# Altium PCB 48V-24V Buck Converter.PcbDoc
Units mil, origin at the board's own origin, x right, y up, seen from the top; angles counter-clockwise.
Board outline 2261.35 x 1643.57 mil, 4 copper layers (Top Layer, L2 - GND, L3 - POWER, Bottom Layer), stack 23.756 mil thick; 39 components, 21 nets, 106 pads, 157 vias.
Unrouted connection lines stored in the file: 7.
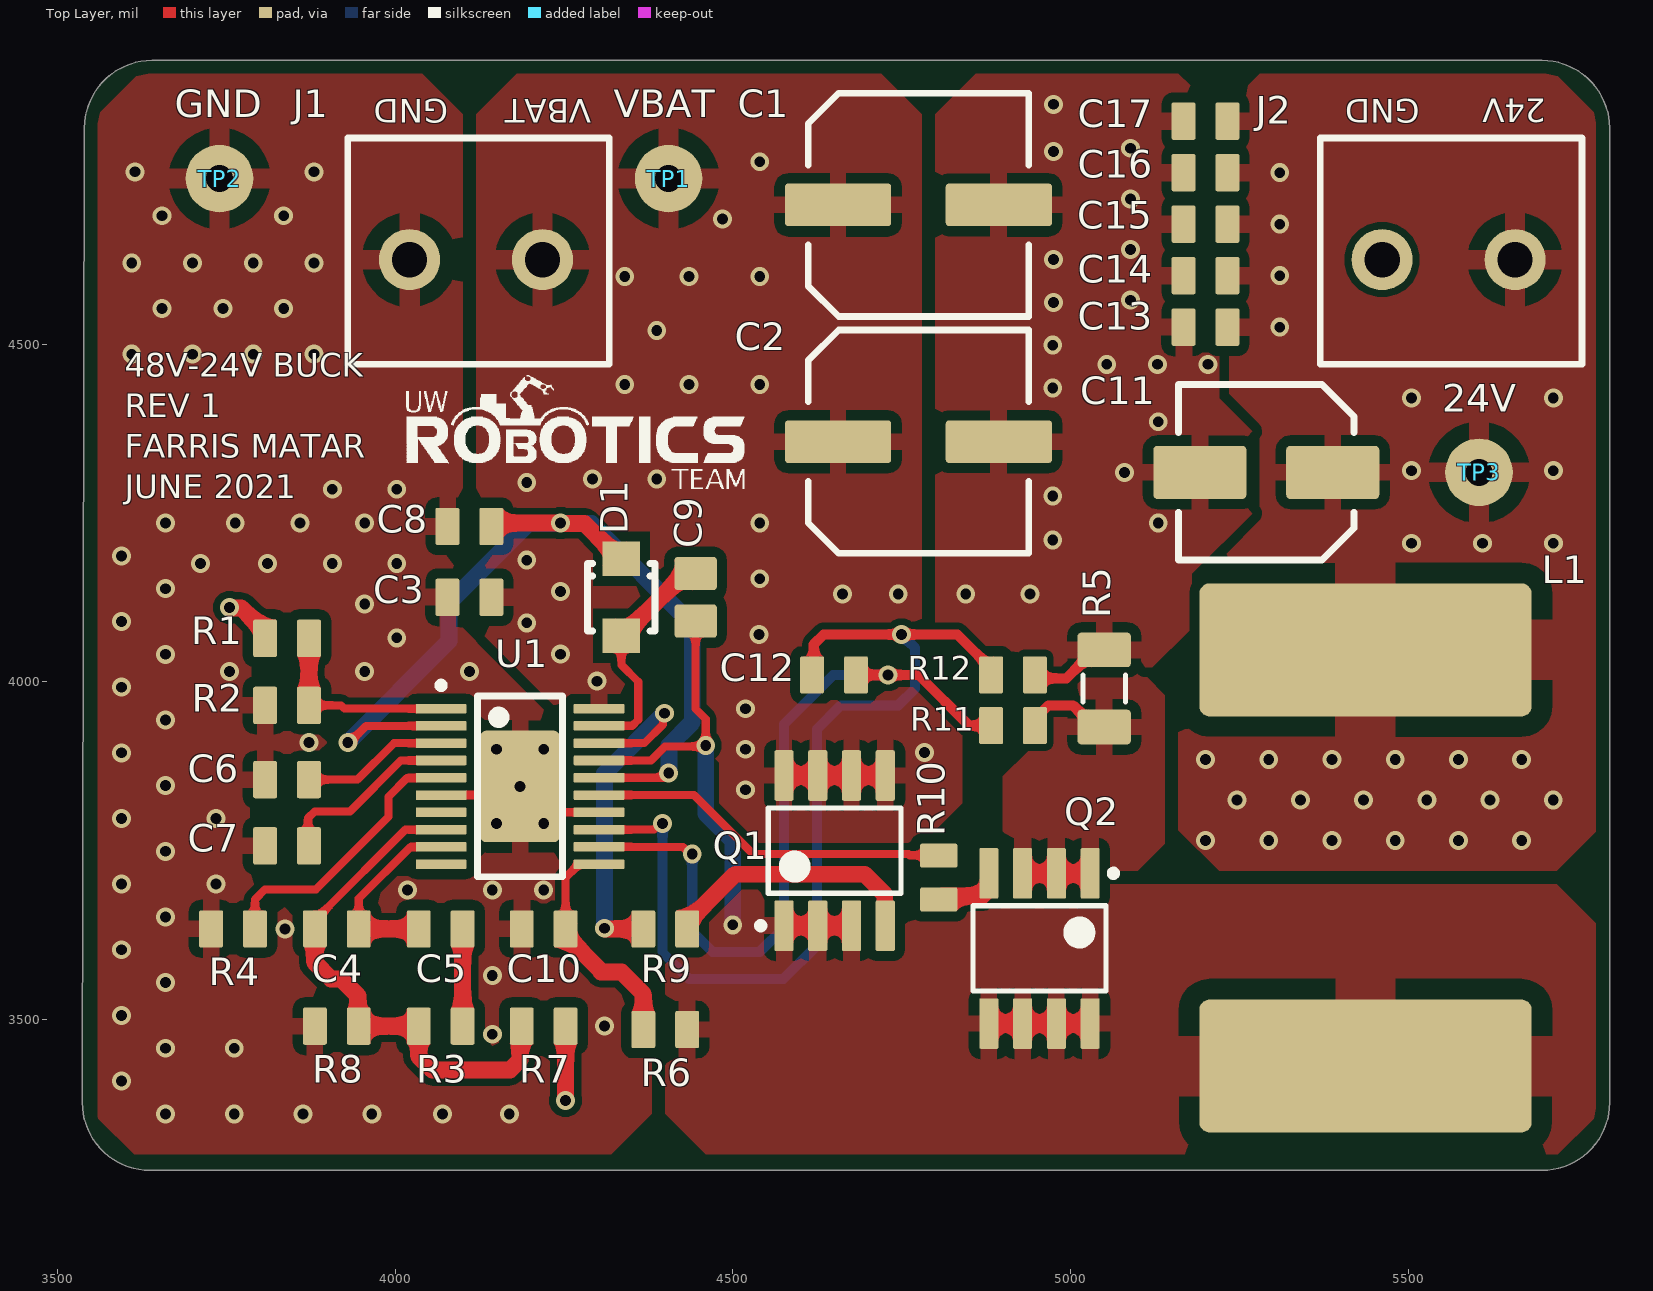
[diagram p0: Top Layer view]
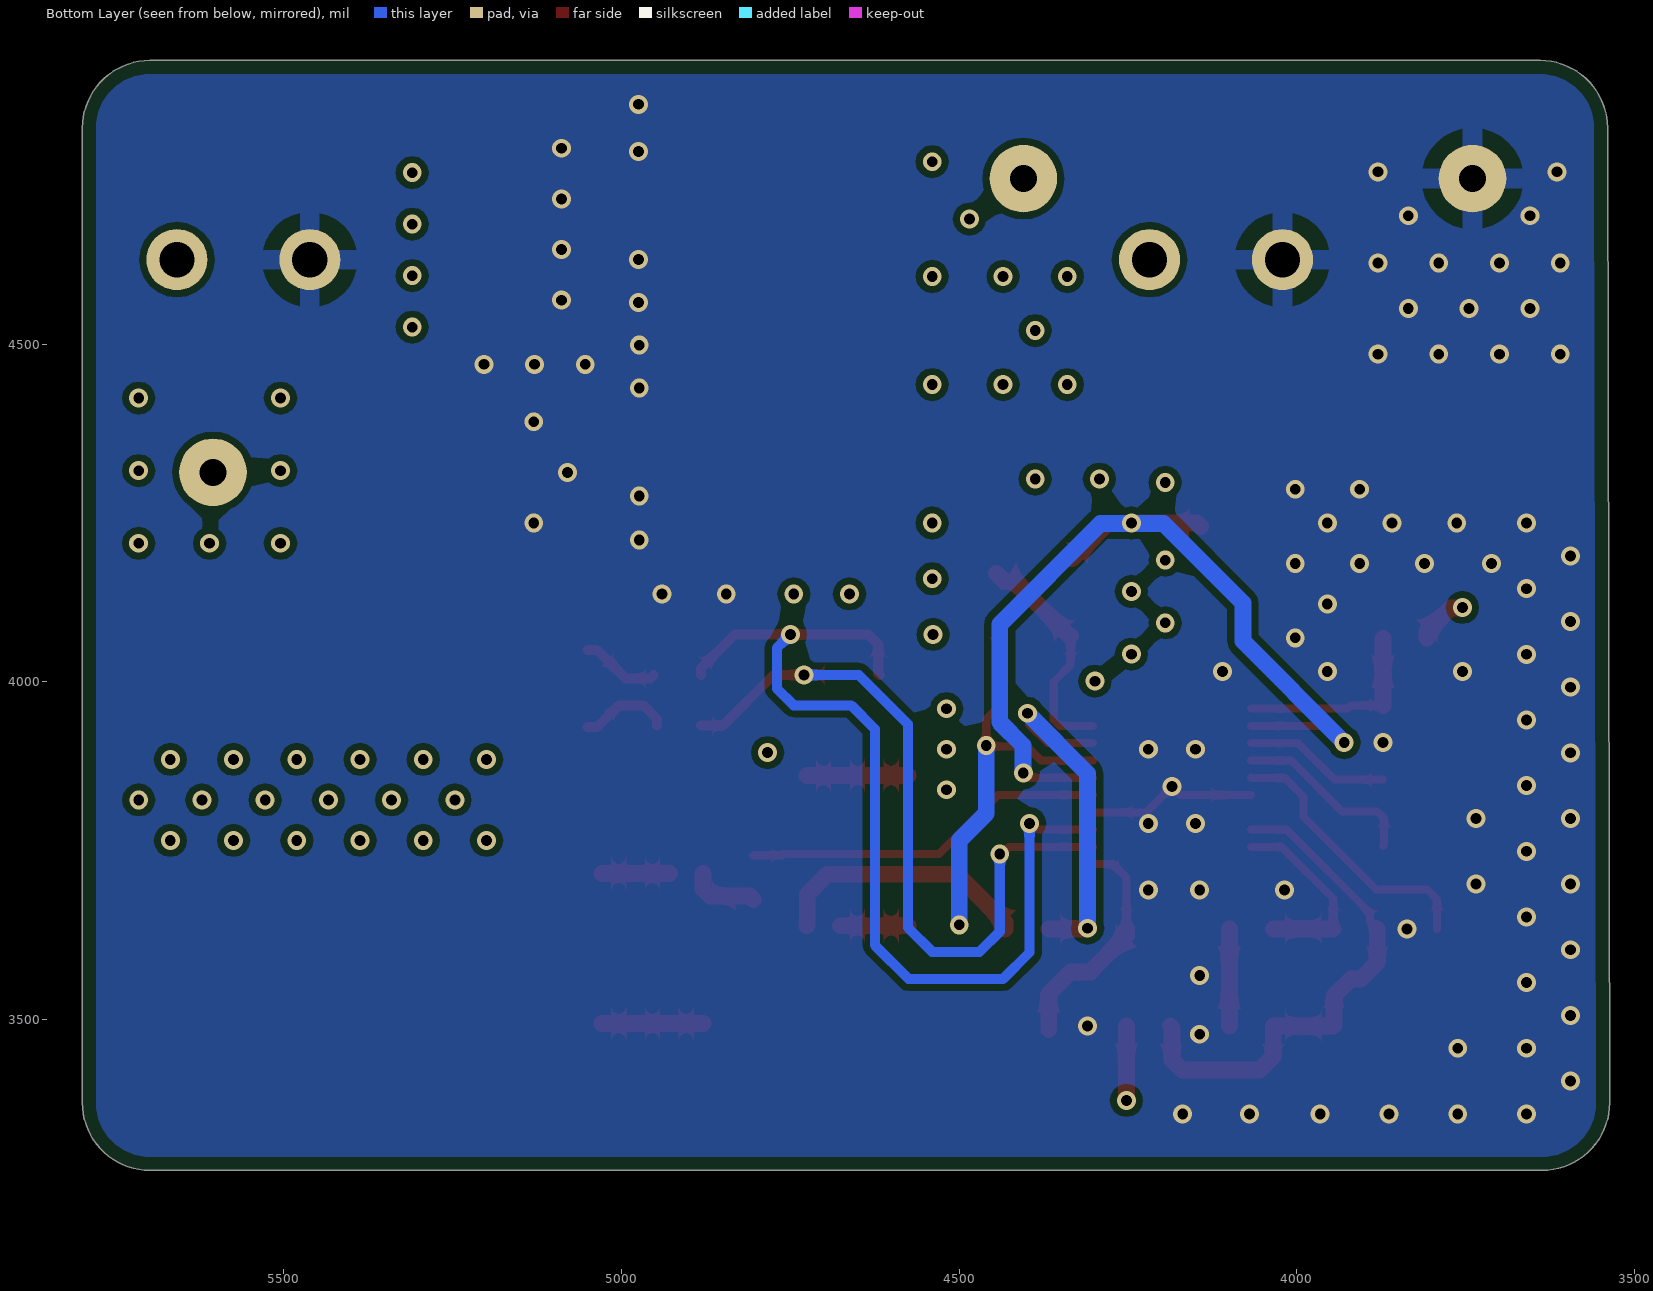
[diagram p1: Bottom Layer view, seen from below]
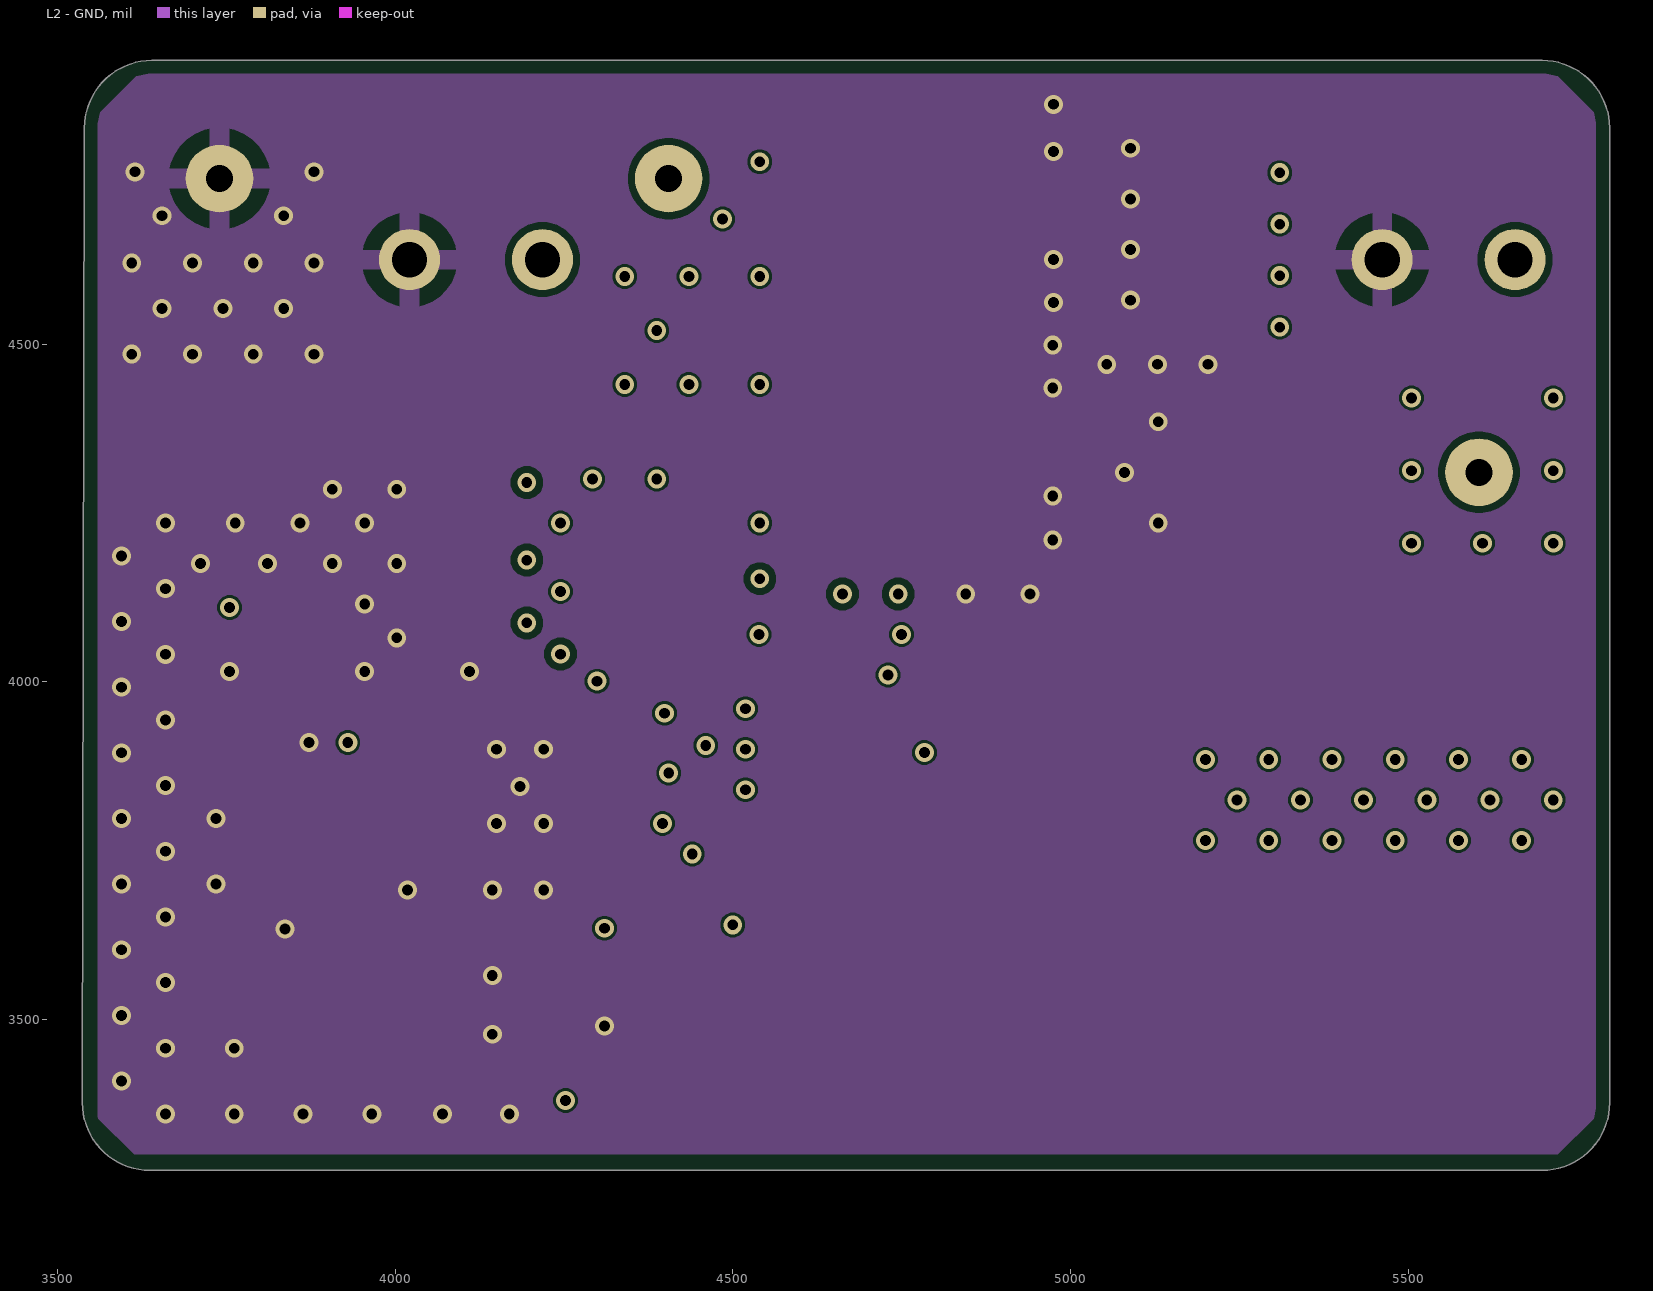
[diagram p2: L2 - GND]
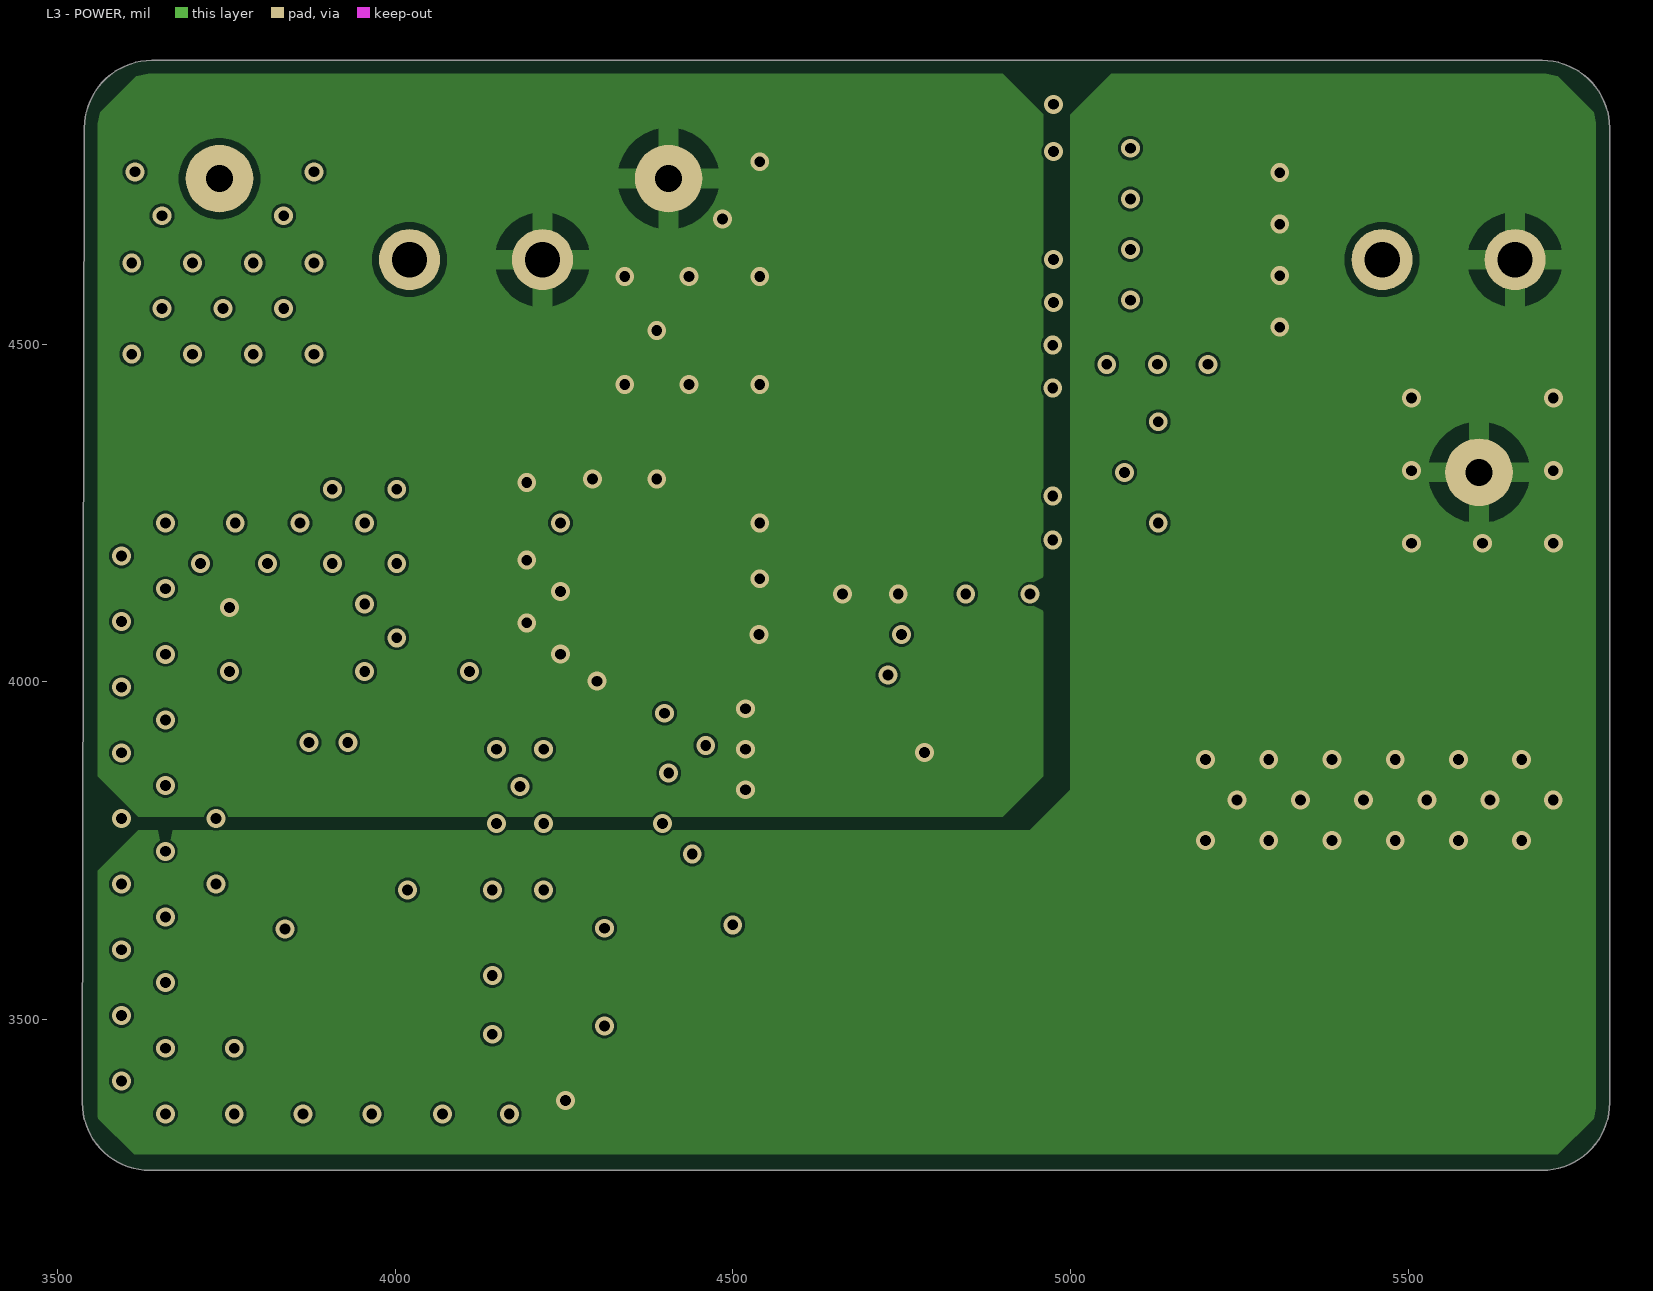
[diagram p3: L3 - POWER]
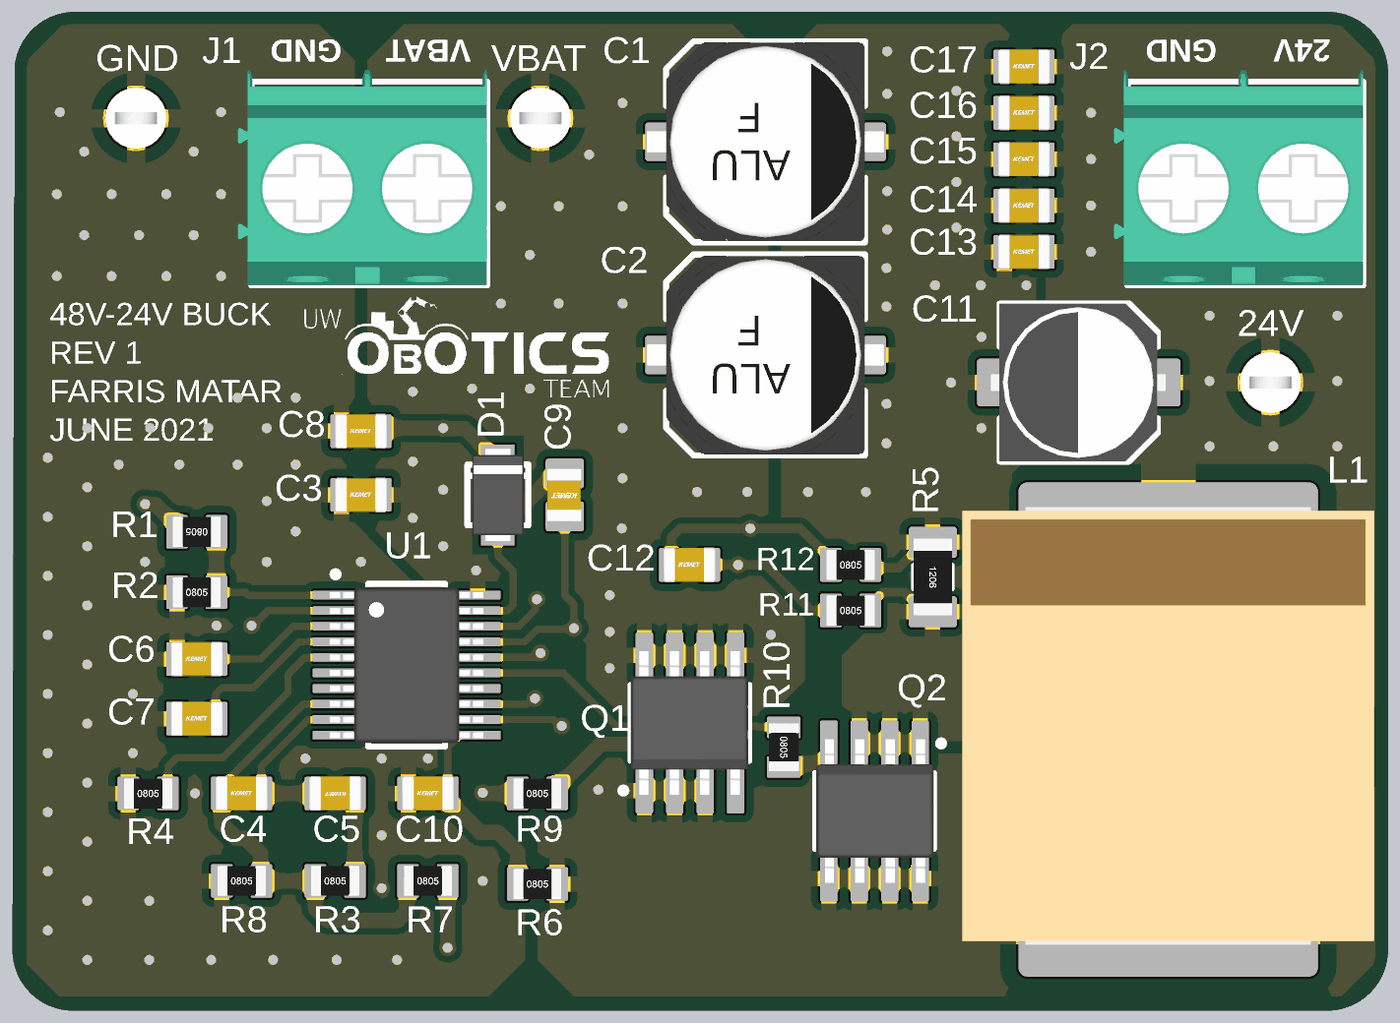
[diagram p4: 3D render of the assembled board from above, using the file's embedded part models]

## Layer stack, top to bottom
Top Solder: solder mask 0.4, Solder Resist, Dk 3.5
Top Layer: signal copper 1.4
Dielectric 2: prepreg 2.8, PP-006, Dk 4.1
L2 - GND: signal copper 1.378
Dielectric 1: dielectric 12.6, FR-4, Dk 4.8
L3 - POWER: signal copper 1.378
Dielectric 3: prepreg 2.8, PP-006, Dk 4.1
Bottom Layer: signal copper 1.4
Bottom Solder: solder mask 0.4, Solder Resist, Dk 3.5

## Board outline
3537,3376.43 ccw(c3637,3376.43) 3637,3276.43 3820.01,3276.43 5698.35,3276.43 ccw(c5698.35,3376.43) 5798.35,3376.43 5798.35,4820 ccw(c5698.35,4820) 5698.35,4920 3640,4920 ccw(c3640,4820) 3540,4820 3540,4800

## Design rules (kind name [scope] priority, off if disabled: settings)
BoardOutlineClearance [All] p1: gap=10 ignorepadtopadclearanceinfootprint=FALSE except(0: Arc-SplitContinuation Track-SplitContinuation SMDPad-SplitContinuation THPad-SplitContinuation Via-SplitContinuation Fill-SplitContinuation Poly-SplitContinuation Region-SplitContinuation Text-SplitContinuation; 20: Poly-OutlineEdge)
Clearance [All] p1: gap=10 ignorepadtopadclearanceinfootprint=FALSE except(0: Arc-Hole Track-Hole SMDPad-Hole THPad-Hole Via-Hole Fill-Hole Poly-Hole Region-Hole Text-Hole; 15: SMDPad-Poly Poly-Poly)
MinimumSolderMaskSliver [All] p1: minsoldermaskwidth=3
PolygonConnect PolygonConnect_CS [(InComponent('R11') OR InComponent('R12'))] p1: thpad.connectstyle=Relief thpad.reliefconductorwidth=10 thpad.reliefentries=4 thpad.polygonreliefangle="90 Angle" thpad.airgapwidth=10 smdpad.connectstyle=NoConnect smdpad.reliefconductorwidth=10 smdpad.reliefentries=4 smdpad.polygonreliefangle="90 Angle" smdpad.airgapwidth=10 via.connectstyle=Relief via.reliefconductorwidth=10 via.reliefentries=4 via.polygonreliefangle="90 Angle" via.airgapwidth=10
PolygonConnect PolygonConnect_Inductor [HasFootprint('IND_PULSE_PA4344')] p2: connectstyle=Relief reliefconductorwidth=90 reliefentries=4 polygonreliefangle="90 Angle" airgapwidth=30
PolygonConnect PolygonConnect_Default [All] p3: thpad.connectstyle=Relief thpad.reliefconductorwidth=30 thpad.reliefentries=4 thpad.polygonreliefangle="90 Angle" thpad.airgapwidth=25 smdpad.connectstyle=Relief smdpad.reliefconductorwidth=25 smdpad.reliefentries=4 smdpad.polygonreliefangle="90 Angle" smdpad.airgapwidth=15 via.connectstyle=Direct via.reliefconductorwidth=10 via.reliefentries=4 via.polygonreliefangle="90 Angle" via.airgapwidth=10
RoutingVias [All] p1: holewidth=12 width=24 viastyle="Through Hole" minholewidth=12 minwidth=24 maxholewidth=28 maxwidth=50
SolderMaskExpansion [All] p1: expansion=4 istentingtop=FALSE
Width [All] p1: maxlimit=50 minlimit=10 preferedwidth=10 midlayer1_maxwidth=10 midlayer2_maxwidth=10 minimp=50.000000 maximp=50.000000 favimp=50.000000
29 further rules are at their usual default settings.

## Components (designator, comment, footprint, x,y, rotation, side; value= is the part's Value field where it differs from the comment)
C1 "CAP_22uF_80V_ALUM" RADIAL_KEMET_KN 4775,4706.14 r270 top value=22µF
C2 "CAP_22uF_80V_ALUM" RADIAL_KEMET_KN 4775,4355.42 r270 top value=22µF
C3 "CAP_0.1uF_100V_0805" CAP0805 4110,4125 r0 top value=0.1µF
C4 "CAP_150pF_16V_0805" CAP0805 3913.75,3634 r0 top value=150pF
C5 "CAP_330pF_50V_0805" CAP0805 4067.5,3634 r180 top value=330pF
C6 "CAP_0.47uF_25V_0805" CAP0805 3840,3855 r0 top value=0.47µF
C7 "CAP_0.015uF_50V_0805" CAP0805 3840,3757 r0 top value=0.015µF
C8 "CAP_0.47uF_25V_0805" CAP0805 4110,4230 r0 top value=0.47µF
C9 "CAP_0.22uF_100V_0805" CAP2012 4445,4125 r90 top value=0.22μF
C10 "CAP_820pF_50V_0805" CAP0805 4220,3634 r0 top value=820pF
C11 "CAP_100uF_35V_ALUM" RADIAL_CORNELL_D 5290,4310.01 r90 top value=100µF
C12 "CAP_NU_0805" CAP0805 4650,4010 r0 top value=NU
C13 "CAP_NU_0805" CAP0805 5200,4525 r0 top value=NU
C14 "CAP_NU_0805" CAP0805 5200,4601.25 r0 top value=NU
C15 "CAP_NU_0805" CAP0805 5200,4677.5 r0 top value=NU
C16 "CAP_NU_0805" CAP0805 5200,4753.75 r0 top value=NU
C17 "CAP_NU_0805" CAP0805 5200,4830 r0 top value=NU
D1 "DIO_SCHOTTKY_100V_150mA" SOD-123_FLAT 4335,4125 r270 top
J1 "CON_2POS_SCREW_TERM" 1935161 4119.8,4625 r180 top
J2 "CON_2POS_SCREW_TERM" 1935161 5560,4625 r180 top
L1 "IND_33uH_12.0A" IND_PULSE_PA4344 5436.98,3745 r270 top
Q1 "NMOS_100V_10.3A" 8-SOIC_NMOS 4650,3750 r90 top
Q2 "NMOS_100V_10.3A" 8-SOIC_NMOS 4955,3605 r270 top
R1 "RES_54.9kΩ_0805_1%" RES0805 3840,4064.34 r180 top value=54.9kΩ
R2 "RES_2.32kΩ_0805_1%" RES0805 3840,3965 r0 top value=2.32kΩ
R3 "RES_133kΩ_0805_1%" RES0805 4067.5,3490 r0 top value=133kΩ
R4 "RES_12.1kΩ_0805_1%" RES0805 3760,3634 r0 top value=12.1kΩ
R5 "RES_0.015Ω_1206_1%" RES1206 5050,3990 r270 top value=0.015Ω
R6 "RES_267kΩ_0805_1%" RES0805 4400,3485 r0 top value=267kΩ
R7 "RES_34.8kΩ_0805_1%" RES0805 4220,3490 r0 top value=34.8kΩ
R8 "RES_1.2kΩ_0805" RES0805 3913.75,3490 r0 top value=1.2kΩ
R9 "RES_0Ω_0805" RES0805 4400,3634 r0 top value=0Ω
R10 "RES_0Ω_0805" RES0805 4805,3710 r270 top value=0Ω
R11 "RES_0Ω_0805" RES0805 4915,3935 r0 top value=0Ω
R12 "RES_0Ω_0805" RES0805 4915,4010 r0 top value=0Ω
TP1 "TESTPOINT_LOOP" TESTPOINT_LOOP 4405,4745 r0 top
TP2 "TESTPOINT_LOOP" TESTPOINT_LOOP 3740,4745 r0 top
TP3 "TESTPOINT_LOOP" TESTPOINT_LOOP 5605,4310 r0 top
U1 "BUCK_LM5117PWP" HTSSOP 4185,3845 r0 top

## Footprints (in the part's own frame and the unit in brackets; to place one, negate y for a bottom-side part, rotate by r counter-clockwise, add the part's x,y. Pads: shape width x height; smd on the part's side, far side on the other; paste and mask are expansions set on the pad)
8-SOIC_NMOS [mm]
  rrect15% 1.9x0.72 smd: 1(-2.827,-1.926) 2(-2.827,-0.656) 2(-2.827,0.614) 2(-2.827,1.884) 3(2.823,-1.926) 3(2.823,-0.656) 3(2.823,0.614) 3(2.823,1.884)
  silkscreen extent -2.95,-2.52 1.6,2.88, body extent -3,-2.45 3,2.45, height 1.63
1935161 [mm] "TERM BLK 2POS SIDE ENTRY 5MM PCB"
  round 2.3 hole 1.325: 1(-2.5,0) 2(2.5,0)
  silkscreen extent -5.01,-4.57 4.83,3.94, body extent -5.01,-5.06 5.39,3.94, height 11.41
CAP0805 [mm] "Chip Capacitor, Body 2.0x1.2mm, Height 0.45mm, IPC Medium Density"
  rrect15% 0.9x1.4 smd: 1(-0.825,0) 2(0.825,0)
  body extent -1.1,-0.73 1.1,0.73, height 1.39
CAP2012 [mm]
  rrect20% 1.25x1.6 smd: 1(-0.895,0) 2(0.895,0)
  body extent -1.1,-0.7 1.1,0.75, height 1.41
HTSSOP [mm]
  rrect15% 1.9x0.36 smd: 1(-2.97,2.925) 2(-2.97,2.275) 3(-2.97,1.625) 4(-2.97,0.975) 5(-2.97,0.325) 6(-2.97,-0.325) 7(-2.97,-0.975) 8(-2.97,-1.625) 9(-2.97,-2.275) 10(-2.97,-2.925) 11(2.97,-2.925) 12(2.97,-2.275) 13(2.97,-1.625) 14(2.97,-0.975) 15(2.97,-0.325) 16(2.97,0.325) 17(2.97,0.975) 18(2.97,1.625) 19(2.97,2.275) 20(2.97,2.925)
  rrect15% 3x4.2 smd: 21(0,0)
  silkscreen extent -3.09,-3.4 1.6,3.92, body extent -3.2,-3.25 3.2,3.25, height 1.1
IND_PULSE_PA4344 [mm]
  rrect15% 5x12.5 smd: 1(-7.675,0) 2(7.975,0)
  body extent -9.14,-8.6 9.14,8.6, height 7.06
RADIAL_CORNELL_D [mm] "Size D radial surface mount capacitor"
  rrect15% 2x3.5 smd: 1(0,-2.5) 2(0,2.5)
  silkscreen extent -3.3,-3.3 3.3,3.3, body extent -3.3,-3.62 3.3,3.67, height 5.9
RADIAL_KEMET_KN [mm]
  rrect15% 1.6x4 smd: 1(0,-3.025) 2(0,3.025)
  silkscreen extent -4.2,-4.15 4.2,4.15, body extent -4.15,-4.95 4.15,4.95, height 10.2
RES0805 [mm] "Chip Resistor, 2-Leads, Body 2.00x1.25mm, IPC High Density"
  rrect15% 0.9x1.4 smd: 1(-0.825,0) 2(0.825,0)
  body extent -1,-0.62 1,0.63, height 0.61
RES1206 [mm] "Chip Resistor, Body 3.2x1.6mm, IPC Medium Density"
  rrect20% 1.3x2 smd: 1(-1.45,0) 2(1.45,0)
  silkscreen extent -0.5,-0.8 0.5,0.8, body extent -1.6,-0.8 1.6,0.8, height 0.61
SOD-123_FLAT [mm]
  rect 1.3x1.4 smd: 1(-1.45,0) 2(1.45,0)
  silkscreen extent -1.27,-1.27 1.27,1.27, body extent -1.93,-1.08 1.92,1.08, height 1.35
TESTPOINT_LOOP [mm]
  round 2.54 hole 1.02: 1(0,0)
  body extent -1.27,-1.27 1.27,1.27, height 4.57

## Part data
C1 C2: "CAP ALUM POLY 22UF 20% 80V SMD", Manufacturer 1=KEMET, Manufacturer Part Number 1=A767KN226M1KLAE045, Package/Footprint=SMD, Supplier Part Number 1=399-15649-1-ND, Voltage Rating=80V, Mounting Type=SMD, Supplier 1=Digi-Key
C3: "CAP CER 0.1UF 100V X7R 0805", Manufacturer 1="TDK Corporation", Manufacturer Part Number 1=C2012X7R2A104K125AA, Package/Footprint=0805, Supplier Part Number 1=445-1418-1-ND, Voltage Rating=100V, Supplier 1=Digi-Key
C4: "CAP CER 150PF 16V X7R 0805", Manufacturer 1="Würth Elektronik", Manufacturer Part Number 1=885012207028, Package/Footprint=0805, Supplier Part Number 1=732-8028-1-ND, Voltage Rating=16V, Supplier 1=Digi-Key
C5: "CAP CER 330PF 50V C0G/NPO 0805", Manufacturer 1=Yageo, Manufacturer Part Number 1=CC0805JRNPO9BN331, Package/Footprint=0805, Supplier Part Number 1=311-1117-1-ND, Voltage Rating=50V, Supplier 1=Digi-Key
C6 C8: "CAP CER 0.47UF 25V X5R 0805", Manufacturer 1=KEMET, Manufacturer Part Number 1=C0805C474K3PAC7800, Package/Footprint=0805, Supplier Part Number 1=399-15508-1-ND, Voltage Rating=25V, Supplier 1=Digi-Key
C7: "CAP CER 0.015UF 50V C0G 0805", Manufacturer 1="TDK Corporation", Manufacturer Part Number 1=CGA4F2C0G1H153J085AA, Package/Footprint=0805, Supplier Part Number 1=445-6948-1-ND, Voltage Rating=50V, Supplier 1=Digi-Key
C9: "CAP CER 0.22UF 100V X7R 0805", Dielectric=X7R, Manufacturer 1="Taiyo Yuden", Manufacturer Part Number 1=HMJ212BB7224KGHT, Package/Footprint=0805, Supplier Part Number 1=587-4221-1-ND, Voltage Rating=100V, Mounting Type=SMD, Supplier 1=Digi-Key
C10: "CAP CER 820PF 50V C0G/NP0 0805", Manufacturer 1=KEMET, Manufacturer Part Number 1=C0805X821J5GAC7800, Package/Footprint=0805, Supplier Part Number 1=399-19481-1-ND, Voltage Rating=50V, Supplier 1=Digi-Key
C11: "CAP ALUM 100UF 20% 35V SMD", Manufacturer 1=Rubycon, Manufacturer Part Number 1=35TKV100M8X10.5, Package/Footprint=SMD, Supplier Part Number 1=1189-2074-1-ND, Voltage Rating=35V, Mounting Type=SMD, Supplier 1=Digi-Key
C12 C13 C14 C15 C16 C17: "PLACEHOLDER CAPACITOR 0805", Package/Footprint=0805, Mounting Type=SMD
D1: "DIODE SCHOTTKY 100V 150MA SOD123", Manufacturer 1="Comchip Technology", Manufacturer Part Number 1=CDBW46-G, Package/Footprint=SOD-123, Supplier Part Number 1=641-1964-1-ND, Mounting Type=SMD, Supplier 1=Digi-Key, Vr (Max)=100V
J1 J2: "TERM BLK 2POS SIDE ENTRY 5MM", Manufacturer 1="Phoenix Contact", Manufacturer Part Number 1=1935161, Package/Footprint=SMD, Supplier Part Number 1=277-1667-ND, Mounting Type=TH, Supplier 1=Digi-Key
L1: "FIXED IND 33UH 12A 37 MOHM SMD", Current Rating=12A, DC Resistance (DCR)=37mR, Inductance=33μH, Inductance Tolerance=20%, Manufacturer 1="Pulse Electronics Power", Manufacturer Part Number 1=PA4344.333ANLT, Supplier Part Number 1=553-4036-1-ND, Test Frequency=100kHz, Mounting Type=SMD, Saturation Current=12A, Supplier 1=Digi-Key
Q1 Q2: "MOSFET N-CH 100V 10.3A 8SOIC", Manufacturer 1="Vishay Siliconix", Manufacturer Part Number 1=SI4058DY-T1-GE3, Package/Footprint=8-SOIC, Supplier Part Number 1=SI4058DY-T1-GE3CT-ND, Id=10.3A, Supplier 1=Digi-Key, Vdss=100V, Vgs (Max)=±20V
R1: "RES SMD 54.9K OHM 1% 1/8W 0805", Manufacturer 1="Panasonic Electronic Components", Manufacturer Part Number 1=ERJ-6ENF5492V, Package/Footprint=0805, Supplier Part Number 1=P54.9KCCT-ND, Supplier 1=Digi-Key
R2: "RES 2.32K OHM 1% 1/4W 0805", Manufacturer 1="Stackpole Electronics Inc", Manufacturer Part Number 1=RNCP0805FTD2K32, Package/Footprint=0805, Supplier Part Number 1=RNCP0805FTD2K32CT-ND, Supplier 1=Digi-Key
R3: "RES SMD 133K OHM 1% 1/8W 0805", Manufacturer 1=Yageo, Manufacturer Part Number 1=RC0805FR-07133KL, Package/Footprint=0805, Supplier Part Number 1=311-133KCRCT-ND, Supplier 1=Digi-Key
R4: "RES 12.1K OHM 1% 1/4W 0805", Manufacturer 1="Stackpole Electronics Inc", Manufacturer Part Number 1=RNCP0805FTD12K1, Package/Footprint=0805, Supplier Part Number 1=RNCP0805FTD12K1CT-ND, Supplier 1=Digi-Key
R5: "RES 0.015 OHM 1% 1/2W 1206", Manufacturer 1="Rohm Semiconductor", Manufacturer Part Number 1=UCR18EVHFSR015, Package/Footprint=1206, Supplier Part Number 1=RHM1305CT-ND, Supplier 1=Digi-Key
R6: "RES SMD 267K OHM 1% 1/8W 0805", Manufacturer 1=Yageo, Manufacturer Part Number 1=RC0603FR-071K2L, Package/Footprint=0805, Supplier Part Number 1=311-267KCRCT-ND, Supplier 1=Digi-Key
R7: "RES 34.8K OHM 1% 1/8W 0805", Manufacturer 1="Stackpole Electronics Inc", Manufacturer Part Number 1=RMCF0805FT34K8, Package/Footprint=0805, Supplier Part Number 1=RMCF0805FT34K8CT-ND, Supplier 1=Digi-Key
R8: library part RES_1.2kΩ_0805_1%, "RES SMD 1.2K OHM 1% 1/8W 0805", Manufacturer 1="Samsung Electro-Mechanics", Manufacturer Part Number 1=RC2012F122CS, Package/Footprint=0805, Supplier Part Number 1=1276-5275-2-ND, Supplier 1=Digi-Key
R9 R10 R11 R12: "RES 0 OHM JUMPER 1/8W 0805", LCSC Part #=C17477, Manufacturer 1="Panasonic Electronic Components", Manufacturer Part Number 1=ERJ-6GEY0R00V, Package/Footprint=0805, Supplier Part Number 1=P0.0ACT-ND, Mounting Type=SMD, Supplier 1=Digi-Key
TP1 TP2 TP3: "TESTPOINT THRUHOLE", Manufacturer 1="Keystone Electronics", Manufacturer Part Number 1=5002, Package/Footprint=TH, Supplier Part Number 1=36-5002-ND, Mounting Type=TH, Supplier 1=Digi-Key
U1: "IC REG CTRLR BUCK 20TSSOP", Manufacturer 1="Texas Instruments", Manufacturer Part Number 1=LM5117PMH/NOPB, Package/Footprint=20-HTSSOP, Supplier Part Number 1=296-41310-1-ND, Mounting Type=SMD, Supplier 1=Digi-Key

## Via types
v1: diameter 28, hole 16, Top Layer to Bottom Layer, tented both sides, 157 vias

## Nets (pads, with @x,y where several pads share a name; then routed paths per layer and width w, separated by ;. In a path a pad name is that pad's centre, name@x,y a point inside that pad or via, vN(x,y) a via of type N, cw(c..) or ccw(c..) an arc to the next point about the centre after c; other vN are vias at no path point)
24V: C11.1 C13.2 C14.2 C15.2 C16.2 C17.2 J2.1 L1.1 R7.2 TP3.1 | length 110
  Top Layer w25: v1(4252.48,3380) R7.2
  other v1: 5200,3765 5293.64,3765 5387.27,3765 5480.91,3765 5574.54,3765 5668.18,3765 5246.82,3825 5340.45,3825 5434.09,3825 5527.73,3825 5621.36,3825 5715,3825 5200,3885 5293.64,3885 5387.27,3885 5480.91,3885 5574.54,3885 5668.18,3885 5505,4205 5610,4205 5715,4205 5505,4312.5 5715,4312.5 5505,4420 5715,4420 5310,4525 5310,4601.25 5310,4677.5 5310,4753.75
COMP: C4.2 C5.2 U1.9 | length 287.1
  Top Layer w12: C4.2 3946.23,3678.74 4022.75,3755.25 4067.89,3755.25 U1.9
  Top Layer w25: C4.2 C5.2
CS: C12.2 R11.1 U1.12 | length 1137.2
  Top Layer w12: U1.12 4426.05,3755.43 4436.48,3745 v1(4440,3745)
  Top Layer w15: C12.2 v1(4730,4010) 4775,4010 4850,3935 R11.1
  Bottom Layer w15: v1(4440,3745) 4440,3630 4470,3600 4540,3600 4575.82,3635.82 4575.82,3937.09 4648.73,4010 v1(4730,4010)
CSG: C12.1 R12.1 U1.13 | length 1478.6
  Top Layer w12: U1.13 4383.35,3781.02 4392.46,3790.14 v1(4395.98,3790.14)
  Top Layer w15: C12.1 4620,4012.48 4620,4055.36 4634.64,4070 v1(4750,4070) 4832.36,4070 4882.52,4019.84 R12.1
  Bottom Layer w15: v1(4395.98,3790.14) 4395.98,3599.02 4435,3560 4575,3560 4625,3610 4625,3930 4660,3965 4745,3965 4770,3990 4770,4050 v1(4750,4070)
FB: C4.1 R3.1 R7.1 R8.2 U1.8 | length 784.6
  Top Layer w12: C4.1 3891.49,3644.22 3891.49,3657.23 4015.26,3781 U1.8@4068.05,3781
  Top Layer w25: C4.1 3881,3633.73 3881,3584 3905,3560 3920,3560 3945,3535 3945,3491.23 R8.2 R3.1 4035,3445 4055,3425 4170,3425 4185,3440 4185,3487.48 R7.1
GND: C1.2 C2.2 C3.1 C6.1 C7.1 C8.1 C10.1 C11.2 C13.1 C14.1 C15.1 C16.1 C17.1 J1.2 J2.2 R2.1 R4.1 R5.1 R8.1 R12.2 TP2.1 U1.6 U1.14 U1.21 | length 372.1
  Top Layer w12: U1.6 4172.2,3832.2 v1(4185,3845) 4223.39,3806.61 U1.14
  Top Layer w15: R12.2@4952.48,4010 4957.48,4005 4994.13,4005 5036.22,4047.09 R5.1
  other v1: 3660,3360 3761.83,3360 3863.67,3360 3965.5,3360 4070,3360 4169.17,3360 3595,3408.61 3660,3457.22 3761.83,3457.22 4144,3478 4310,3490 3595,3505.83 3660,3554.44 4144,3565 3595,3603.06 3837,3634 3660,3651.67 4018.59,3691.41 4144,3691.41 4220,3691.41 3595,3700.28 3735,3700.28 3660,3748.89 4150,3790 4220,3790 3595,3797.5 3735,3797.5 3660,3846.11 3595,3894.72 4150,3900 4220,3900 3872.48,3910 3660,3943.33 3595,3991.94 3755,4015 3955,4015 4110,4015 3660,4040.56 4002.5,4065 3595,4089.17 3955,4115 4845,4130 4940,4130 3660,4137.78 3711.67,4175 3811.25,4175 3907.08,4175 4002.5,4175 3595,4186.39 4973.76,4210 3660,4235 3763.33,4235 3859.17,4235 3955,4235 5130,4235 4973.76,4275 3907.08,4285 4002.5,4285 5080,4310 5130,4385 4973.76,4435 5053.76,4470 5128.76,4470 5203.76,4470 3610,4485 3700,4485 3790,4485 3880,4485 4973.76,4498.33 3655,4552.5 3745,4552.5 3835,4552.5 4975,4561.67 5088.76,4565 3610,4620 3700,4620 3790,4620 3880,4620 4975,4625 5088.76,4640 3655,4690 3835,4690 5088.76,4715 3615,4755 3880,4755 4975,4785 5088.76,4790 4975,4855
HB: C9.2 D1.2 U1.19 | length 344.6
  Top Layer w12: U1.19 4350.8,3934.57 4360,3943.77 4360,4000 4335,4025 D1.2
  Top Layer w25: D1.2 4336.97,4067.91 4417.19,4148.13 4432.89,4148.13 C9.2
HO: R9.1 U1.18 | length 537.8
  Top Layer w12: U1.18 4368.86,3908.98 4396.59,3936.7 4396.59,3950.85 v1(4399.07,3953.33)
  Top Layer w25: v1(4310,3635) 4310.81,3635 4311.81,3634 R9.1
  Bottom Layer w25: v1(4310,3635) 4310,3864.26 v1(4399.07,3953.33) v1@4398.26,3953.33
LO: R10.1 U1.15 | length 540.2
  Top Layer w12: U1.15 4442.8,3832.2 4530,3745 4760,3745 4762,3743 4804.48,3743 R10.1
NetC5_1: C5.1 R3.2 | length 144
  Top Layer w25: R3.2 C5.1
NetQ1_1: Q1.1 R9.2 | length 390.9
  Top Layer w25: R9.2 4432.48,3643.84 4503.64,3715 4695,3715 4725,3685 4725,3639.52 Q1.1
NetQ2_1: Q2.1 R10.2 | length 103.8
  Top Layer w25: R10.2 4810.22,3682.74 4868.85,3682.74 4879.18,3693.07 Q2.1
NetQ2_2: Q2.2 R5.2 R11.2 | length 234
  Top Layer w15: R11.2 4947.48,3944.84 4967.64,3965 5004.07,3965 5036.16,3932.91 R5.2
  Top Layer w25: Q2.2@4929.18,3716.3 4979.18,3716.3 Q2.2@5029.18,3716.3
RAMP: C10.2 R6.1 U1.11 | length 347.8
  Top Layer w12: C10.2 4252.48,3709.88 4272.44,3729.84 U1.11
  Top Layer w25: C10.2 4252.48,3624.16 4305,3571.64 4305,3570 4335,3570 4367.52,3537.48 R6.1
RES: C6.2 U1.3 | length 217.9
  Top Layer w12: C6.2 3944.55,3855 3998.52,3908.98 U1.3
RT: R4.2 U1.5 | length 411.1
  Top Layer w12: R4.2 3792.48,3677.48 3807.62,3692.62 3882.62,3692.62 3990,3800 3990,3829.64 4017.74,3857.38 4067.66,3857.38 U1.5
SS: C7.2 U1.4 | length 274
  Top Layer w12: C7.2 3871,3758.48 3871,3797.97 3881.01,3807.99 3932.99,3807.99 4008.39,3883.39 U1.4
SW: C9.1 L1.2 Q1.2 Q2.3 R6.2 U1.17 | length 889.9
  Top Layer w12: U1.17 4379.12,3883.39 4399.87,3904.14 4458.45,3904.14 v1(4460,3905.69) 4460,3945 4445,3960 C9.1
  Top Layer w25: Q1.2@4575.82,3638.7 4625.82,3638.7 Q1.2@4675.82,3638.7 ; Q2.3@4879.18,3493.86 4929.18,3493.86 4979.18,3493.86 Q2.3@5029.18,3493.86
  Bottom Layer w25: v1(4460,3905.69) 4460,3805 4500,3765 v1(4500,3640)
UVLO: R1.1 R2.2 U1.1 | length 296.9
  Top Layer w12: R2.2 3920,3965 3924.84,3960.16 U1.1
  Top Layer w25: R2.2 R1.1
VBAT: C1.1 C2.1 C3.2 J1.1 Q1.3 R1.2 TP1.1 U1.20 | length 227.2
  Top Layer w25: v1(3755,4110) 3755.57,4109.43 3772.27,4109.43 3807.52,4074.18 R1.2 ; Q1.3@4575.82,3861.14 4625.82,3861.14 4675.82,3861.14 Q1.3@4725.82,3861.14
  other v1: 4518.76,3840 4783.76,3895 4518.76,3900 4518.76,3960 4299.19,4000.81 4245,4040.81 4538.76,4070 4195,4087.21 4662.5,4130 4745,4130 4245,4133.6 4540,4152.5 4195,4180 4540,4235 4195,4295 4292.5,4300 4387.5,4300 4340,4440 4435,4440 4540,4440 4387.5,4520 4340,4600 4435,4600 4540,4600 4485,4685 4540,4770
VCC: C8.2 D1.1 U1.2 U1.16 | length 1447.4
  Top Layer w12: v1(3930,3910) 3932.48,3910 3957.05,3934.57 U1.2 ; U1.16 4394.56,3857.8 4401.62,3864.86 v1(4405.14,3864.86)
  Top Layer w25: C8.2 4147.48,4235 v1(4245,4235) 4245.57,4234.43 4280.69,4234.43 4333.03,4182.09 D1.1 D1.1@4336.97,4182.09
  Bottom Layer w25: v1(3930,3910) 4080,4060 4080,4116.62 4197.81,4234.43 4244.43,4234.43 v1(4245,4235) 4245.57,4234.43 4290.57,4234.43 4440,4085 4440,3940 4405.57,3905.57 4405.57,3865.3 v1(4405.14,3864.86)
pads on no net: U1.7 U1.10

## Polygon pours and split planes (outlines as drawn)
NetQ2_2 on Top Layer "RSENSE_L01_P02" (solid, remove dead copper, pour order 21): 5100,4020 5140,3980 5140,3760 5100,3720 4940,3720 4900,3760 4900,3860 4960,3920 4960,3960 5020,4020
GND on Top Layer "GND_L01_P08" (solid, remove dead copper, pour order 16): 4040,4900 4100,4840 4100,4080 4260,3920 4320,3920 4380,3860 4380,3360 4320,3300 3613.43,3300 3560,3353.43 3560,4840 3620,4900
GND on Top Layer "GND_L01_P06" (solid, remove dead copper, pour order 14): 5220,4420 5280,4360 5280,4260 5180,4160 5180,4080 5120,4020 4860,4020 4800,4080 4800,4840 4860,4900 5160,4900 5220,4840
VBAT on Top Layer "VBAT_L01_P03" (solid, remove dead copper, pour order 13): 4780,4040 4840,3980 4840,3820 4780,3760 4540,3760 4480,3820 4480,3880 4420,3940 4260,3940 4120,4080 4120,4840 4180,4900 4720,4900 4780,4840
SW on Top Layer "SW_L01_P01" (solid, remove dead copper, pour order 9): 5721.92,3300 5780,3358.08 5780,3640 5720,3700 4460,3700 4400,3640 4400,3360 4460,3300
24V on Top Layer "24V_L01_P07" (solid, remove dead copper, pour order 15): 5220,4440 5280,4380 5280,4260 5160,4140 5160,4080 5160,3780 5220,3720 5720,3720 5780,3780 5780,4838.35 5718.35,4900 5280,4900 5220,4840
24V on L3 - POWER "24V_L03_P09" (solid, remove dead copper, pour order 19): 5000,4839.43 5060.57,4900 5718.35,4900 5780,4838.35 5780,3358.08 5721.92,3300 3613.43,3300 3560,3353.43 3560,3720 3620,3780 4940,3780 5000,3840
VBAT on L3 - POWER "VBAT_L03_P05" (solid, remove dead copper, pour order 7): 3620,4900 4900,4900 4960,4840 4960,3860 4900,3800 3620,3800 3560,3860 3560,4840
GND on L2 - GND "GND_L02_P04" (solid, remove dead copper, pour order 5): 3560,4840 3620,4900 5718.35,4900 5780,4838.35 5780,3358.08 5721.92,3300 3613.43,3300 3560,3353.43
GND on Bottom Layer "GND_L04_P018" (solid, remove dead copper, pour order 18): 3537,3376.43 ccw(c3637,3376.43) 3637,3276.43 3820.01,3276.43 5698.35,3276.43 ccw(c5698.35,3376.43) 5798.35,3376.43 5798.35,4820 ccw(c5698.35,4820) 5698.35,4920 3640,4920 ccw(c3640,4820) 3540,4820 3540,4800

## Silkscreen, mask and mechanical layers (free items; w line width, h text height)
Top Overlay:
  drawing of 16 lines, arcs and shapes, not listed
  text "24V" at 5703.94,4875 h60 r180
  text "GND" at 4078.37,4874.28 h60 r180
  text "VBAT" at 4290.71,4874.28 h60 r180
  text "GND" at 5517,4874.28 h60 r180
  text "GND" at 3673.71,4822.58 h70
  text "VBAT" at 4323.97,4822.58 h70
  text "24V" at 5550.34,4386.8 h70
  text "48V-24V BUCK / REV 1 / FARRIS MATAR / JUNE 2021" at 3600,4260 h60
Mechanical 1:
  lines w10: 3536.42,3376.43 3540,4800 3540,4820 cw(c3640,4820) 3640,4920 3820,4920 5698.35,4920 cw(c5698.35,4820) 5798.35,4820 5798.35,3376.43 cw(c5698.35,3376.43) 5698.35,3276.43 3820.01,3276.43 ; 3537,3376.43 ccw(c3637,3376.43) 3637,3276.43 3820.01,3276.43 ; 3820.01,3276.43 ccw(c3820.01,3276.43) 3820.01,3276.43